# Altium PCB Odin_0.pcbdoc (part 1 of 3)
Units mil, origin at the board's own origin, x right, y up, seen from the top; angles counter-clockwise.
Board outline 3937 x 3937 mil, 4 copper layers (Top Layer, mSIG, mPWR, Bottom Layer), stack 62.3 mil thick; 149 components, 218 nets, 830 pads, 480 vias.
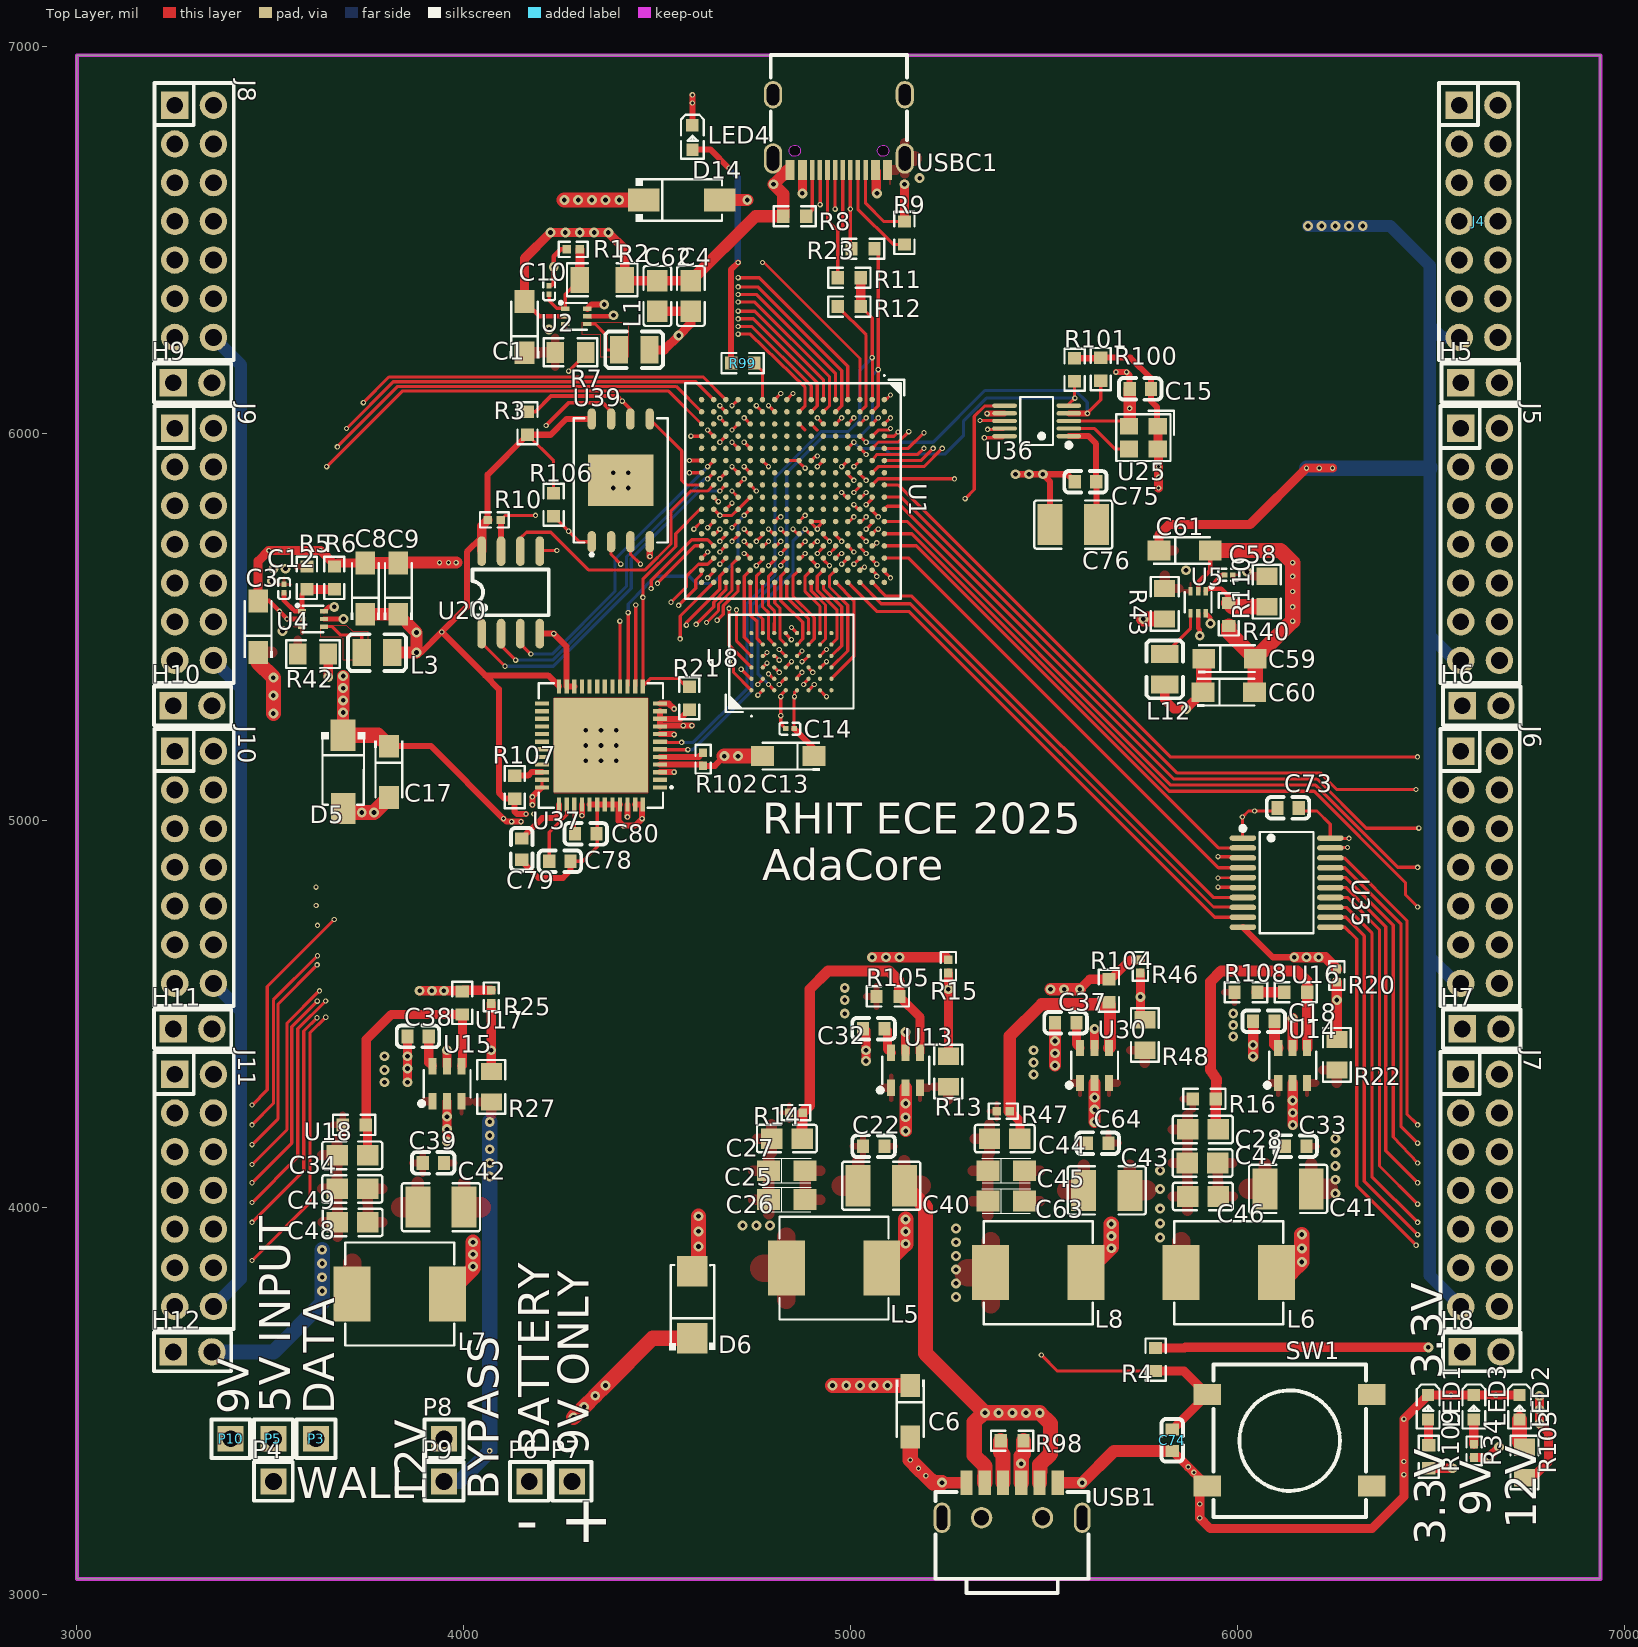
[diagram p0: Top Layer view]
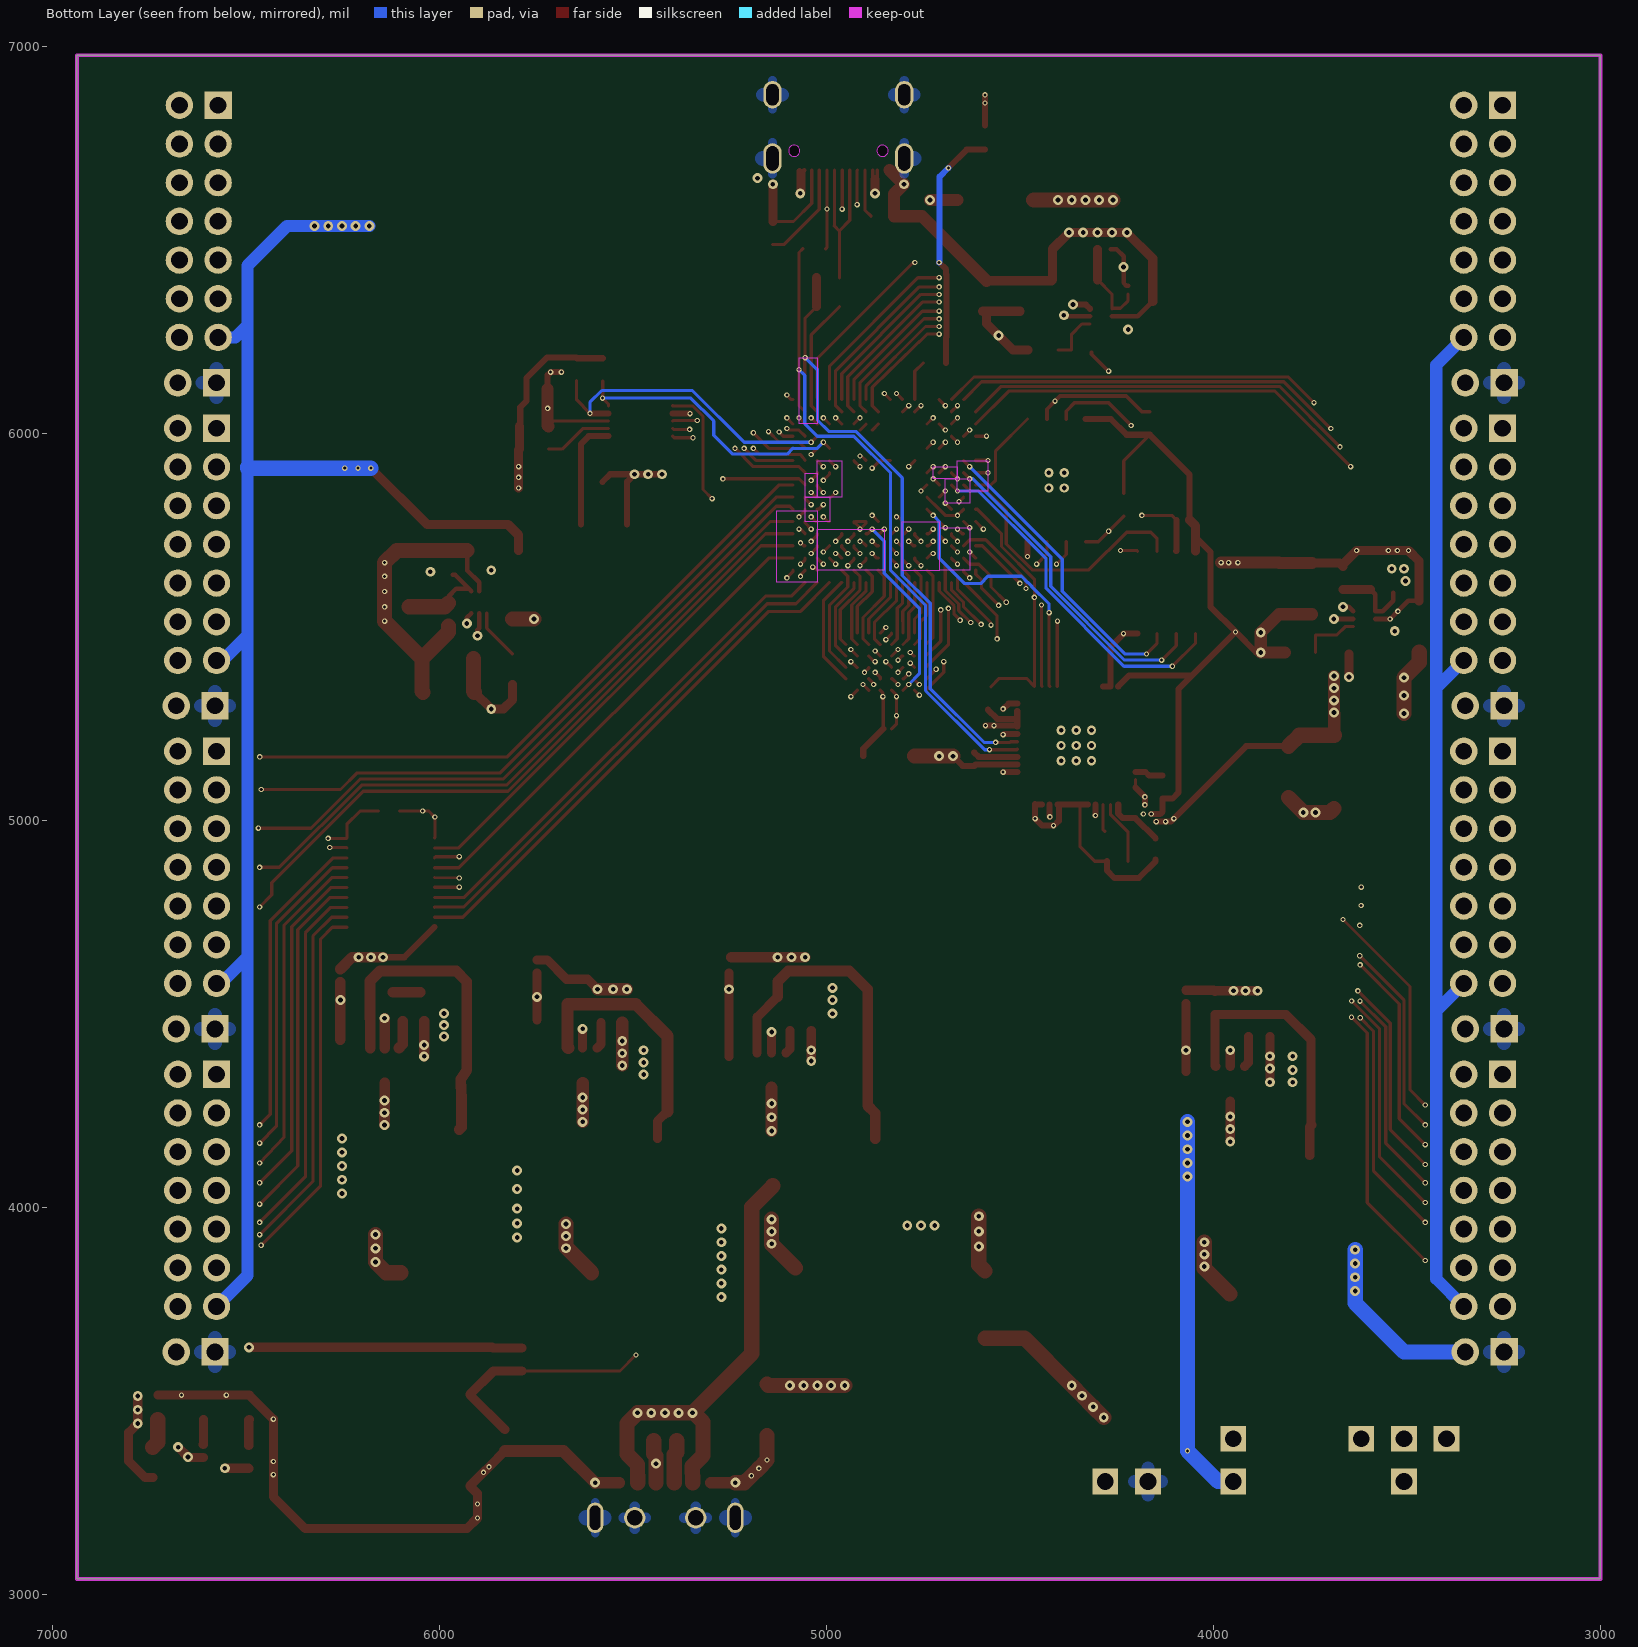
[diagram p1: Bottom Layer view, seen from below]
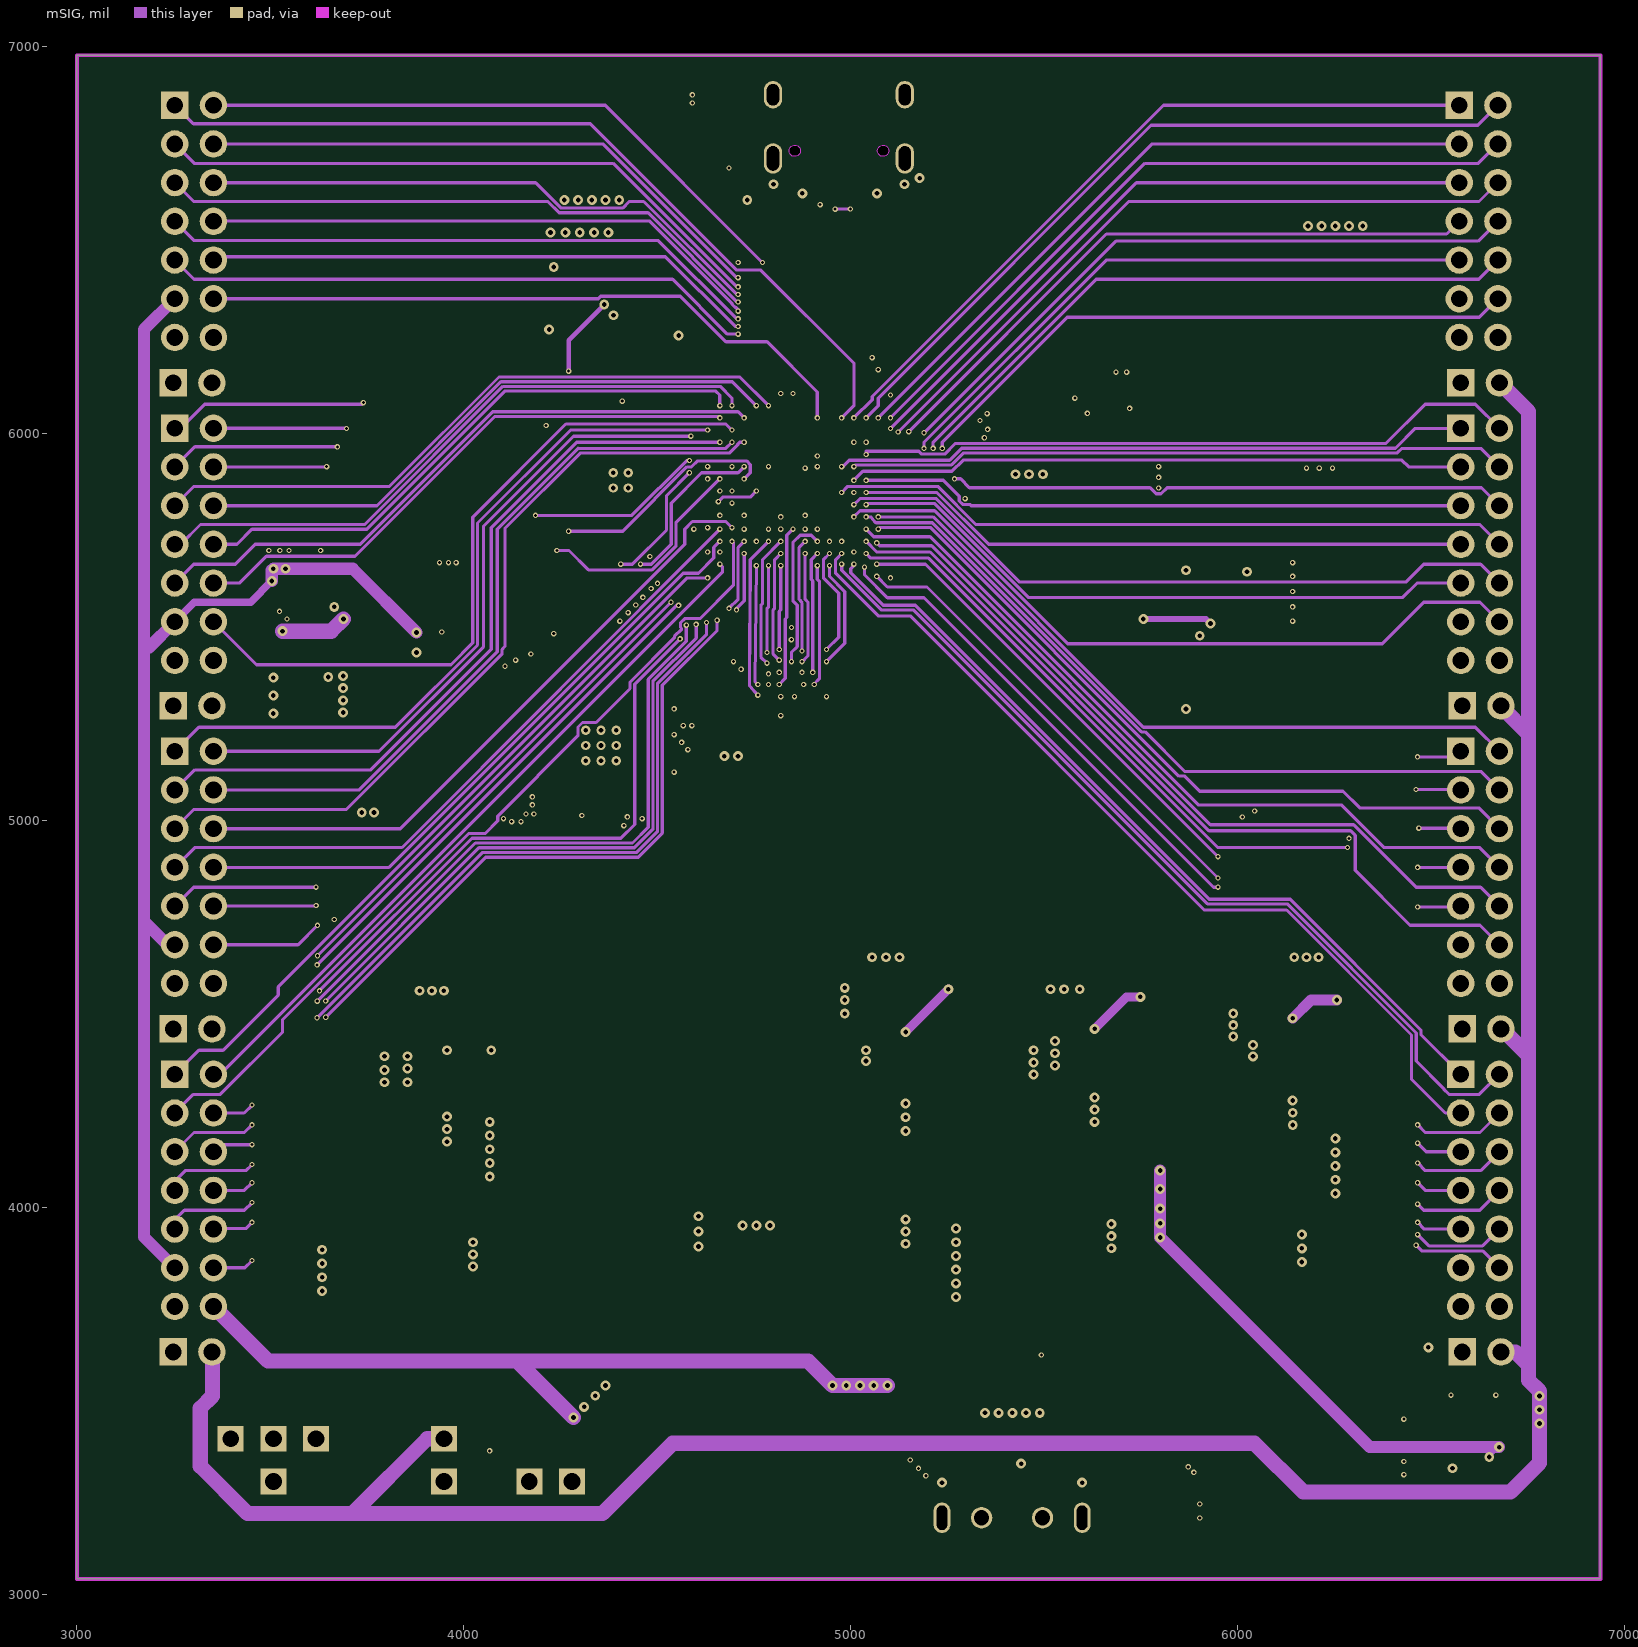
[diagram p2: mSIG]
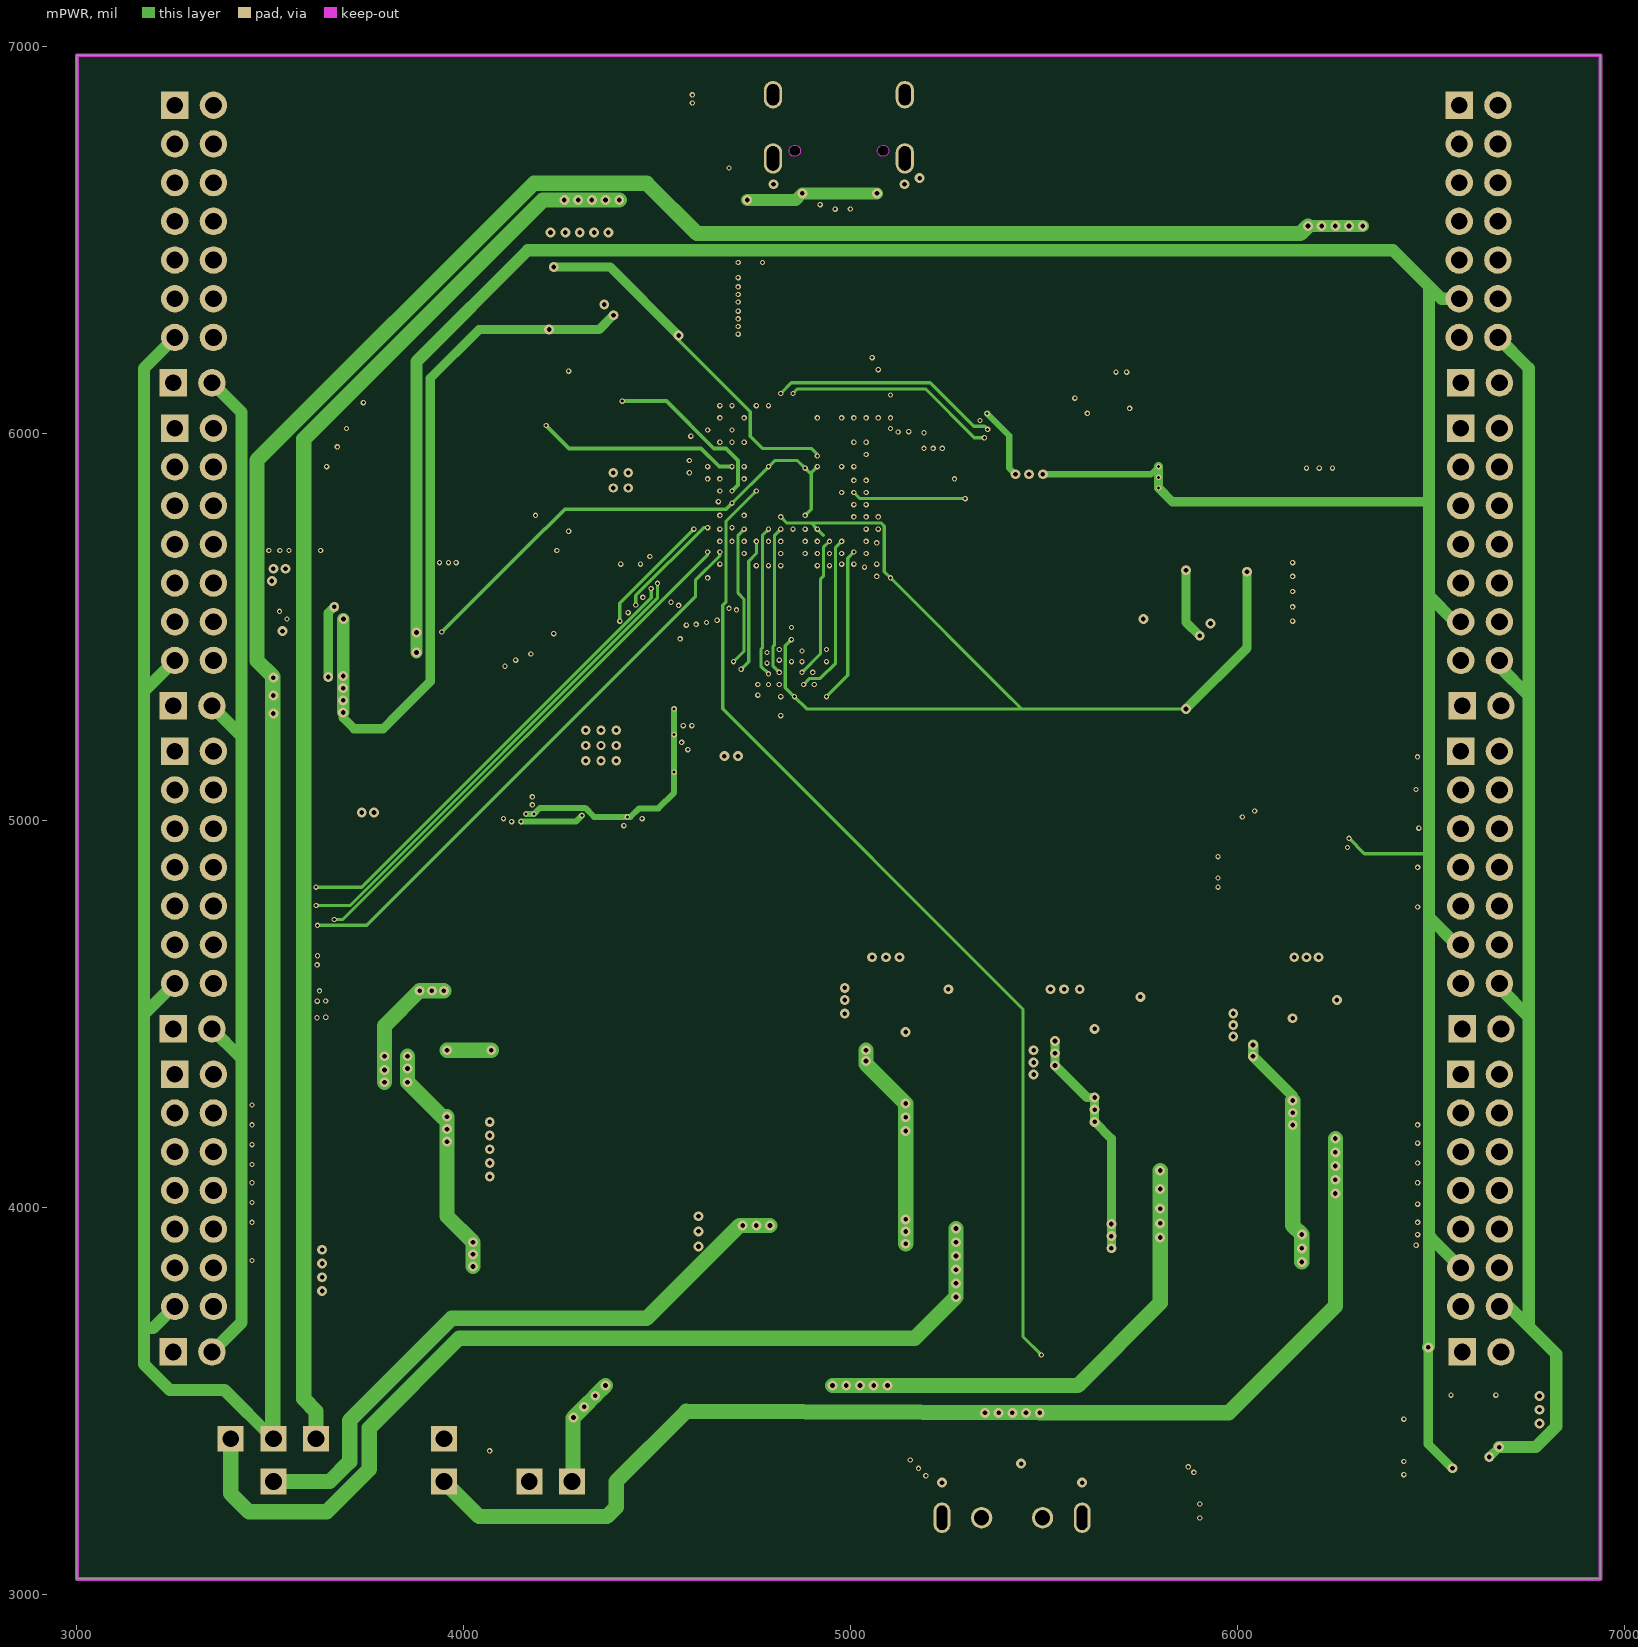
[diagram p3: mPWR]

## Layer stack, top to bottom
Top Solder Mask Layer: solder mask 0.4, Dk 3.3
Top Layer: signal copper 1.4
Dielectric1: surface 18.9, PP, Dk 4.5
mSIG: signal copper 1.4
Dielectric2: surface 18.9, FR4, Dk 4.5
mPWR: signal copper 1.4
Dielectric3: surface 18.9, PP, Dk 4.5
Bottom Layer: signal copper 1.4
Bottom Solder Mask Layer: solder mask 0.4, Dk 3.3

## Board outline
3000,3040.8 3000,6977.8 6937,6977.8 6937,3040.8

## Design rules (kind name [scope] priority, off if disabled: settings)
BoardOutlineClearance Default [All] p0: genericclearance=10 ignorepadtopadclearanceinfootprint=FALSE except(0: Arc-SplitContinuation Track-SplitContinuation SMDPad-SplitContinuation THPad-SplitContinuation Via-SplitContinuation Fill-SplitContinuation Poly-SplitContinuation Region-SplitContinuation Text-SplitContinuation)
BoardOutlineClearance Plane_Default [All] p0: genericclearance=10 ignorepadtopadclearanceinfootprint=FALSE except(0: Arc-SplitContinuation Track-SplitContinuation SMDPad-SplitContinuation THPad-SplitContinuation Via-SplitContinuation Fill-SplitContinuation Poly-SplitContinuation Region-SplitContinuation Text-SplitContinuation)
BoardOutlineClearance Copper_Default [All] p0: genericclearance=10 ignorepadtopadclearanceinfootprint=FALSE except(0: Arc-SplitContinuation Track-SplitContinuation SMDPad-SplitContinuation THPad-SplitContinuation Via-SplitContinuation Fill-SplitContinuation Poly-SplitContinuation Region-SplitContinuation Text-SplitContinuation)
BoardOutlineClearance Copper_gge174503 [All] p0: genericclearance=10 ignorepadtopadclearanceinfootprint=FALSE except(0: Arc-SplitContinuation Track-SplitContinuation SMDPad-SplitContinuation THPad-SplitContinuation Via-SplitContinuation Fill-SplitContinuation Poly-SplitContinuation Region-SplitContinuation Text-SplitContinuation)
BoardOutlineClearance Copper_gge40692 [All] p0: genericclearance=10 ignorepadtopadclearanceinfootprint=FALSE except(0: Arc-SplitContinuation Track-SplitContinuation SMDPad-SplitContinuation THPad-SplitContinuation Via-SplitContinuation Fill-SplitContinuation Poly-SplitContinuation Region-SplitContinuation Text-SplitContinuation)
BoardOutlineClearance Copper_gge45518 [All] p0: genericclearance=10 ignorepadtopadclearanceinfootprint=FALSE except(0: Arc-SplitContinuation Track-SplitContinuation SMDPad-SplitContinuation THPad-SplitContinuation Via-SplitContinuation Fill-SplitContinuation Poly-SplitContinuation Region-SplitContinuation Text-SplitContinuation)
BoardOutlineClearance Copper_gge47558 [All] p0: genericclearance=10 ignorepadtopadclearanceinfootprint=FALSE except(0: Arc-SplitContinuation Track-SplitContinuation SMDPad-SplitContinuation THPad-SplitContinuation Via-SplitContinuation Fill-SplitContinuation Poly-SplitContinuation Region-SplitContinuation Text-SplitContinuation)
BoardOutlineClearance Copper_gge48503 [All] p0: genericclearance=10 ignorepadtopadclearanceinfootprint=FALSE except(0: Arc-SplitContinuation Track-SplitContinuation SMDPad-SplitContinuation THPad-SplitContinuation Via-SplitContinuation Fill-SplitContinuation Poly-SplitContinuation Region-SplitContinuation Text-SplitContinuation)
BoardOutlineClearance Copper_gge48509 [All] p0: genericclearance=10 ignorepadtopadclearanceinfootprint=FALSE except(0: Arc-SplitContinuation Track-SplitContinuation SMDPad-SplitContinuation THPad-SplitContinuation Via-SplitContinuation Fill-SplitContinuation Poly-SplitContinuation Region-SplitContinuation Text-SplitContinuation)
BoardOutlineClearance Copper_gge55369 [All] p0: genericclearance=10 ignorepadtopadclearanceinfootprint=FALSE except(0: Arc-SplitContinuation Track-SplitContinuation SMDPad-SplitContinuation THPad-SplitContinuation Via-SplitContinuation Fill-SplitContinuation Poly-SplitContinuation Region-SplitContinuation Text-SplitContinuation)
BoardOutlineClearance Copper_gge55381 [All] p0: genericclearance=10 ignorepadtopadclearanceinfootprint=FALSE except(0: Arc-SplitContinuation Track-SplitContinuation SMDPad-SplitContinuation THPad-SplitContinuation Via-SplitContinuation Fill-SplitContinuation Poly-SplitContinuation Region-SplitContinuation Text-SplitContinuation)
BoardOutlineClearance Copper_gge70515 [All] p0: genericclearance=10 ignorepadtopadclearanceinfootprint=FALSE except(0: Arc-SplitContinuation Track-SplitContinuation SMDPad-SplitContinuation THPad-SplitContinuation Via-SplitContinuation Fill-SplitContinuation Poly-SplitContinuation Region-SplitContinuation Text-SplitContinuation)
BoardOutlineClearance Copper_gge71742 [All] p0: genericclearance=10 ignorepadtopadclearanceinfootprint=FALSE except(0: Arc-SplitContinuation Track-SplitContinuation SMDPad-SplitContinuation THPad-SplitContinuation Via-SplitContinuation Fill-SplitContinuation Poly-SplitContinuation Region-SplitContinuation Text-SplitContinuation)
BoardOutlineClearance Copper_gge72967 [All] p0: genericclearance=10 ignorepadtopadclearanceinfootprint=FALSE except(0: Arc-SplitContinuation Track-SplitContinuation SMDPad-SplitContinuation THPad-SplitContinuation Via-SplitContinuation Fill-SplitContinuation Poly-SplitContinuation Region-SplitContinuation Text-SplitContinuation)
BoardOutlineClearance Copper_gge73033 [All] p0: genericclearance=10 ignorepadtopadclearanceinfootprint=FALSE except(0: Arc-SplitContinuation Track-SplitContinuation SMDPad-SplitContinuation THPad-SplitContinuation Via-SplitContinuation Fill-SplitContinuation Poly-SplitContinuation Region-SplitContinuation Text-SplitContinuation)
BoardOutlineClearance Copper_gge75860 [All] p0: genericclearance=10 ignorepadtopadclearanceinfootprint=FALSE except(0: Arc-SplitContinuation Track-SplitContinuation SMDPad-SplitContinuation THPad-SplitContinuation Via-SplitContinuation Fill-SplitContinuation Poly-SplitContinuation Region-SplitContinuation Text-SplitContinuation)
BoardOutlineClearance Copper_gge75899 [All] p0: genericclearance=10 ignorepadtopadclearanceinfootprint=FALSE except(0: Arc-SplitContinuation Track-SplitContinuation SMDPad-SplitContinuation THPad-SplitContinuation Via-SplitContinuation Fill-SplitContinuation Poly-SplitContinuation Region-SplitContinuation Text-SplitContinuation)
BoardOutlineClearance Copper_gge90659 [All] p0: genericclearance=10 ignorepadtopadclearanceinfootprint=FALSE except(0: Arc-SplitContinuation Track-SplitContinuation SMDPad-SplitContinuation THPad-SplitContinuation Via-SplitContinuation Fill-SplitContinuation Poly-SplitContinuation Region-SplitContinuation Text-SplitContinuation)
BoardOutlineClearance Copper_gge93999 [All] p0: genericclearance=10 ignorepadtopadclearanceinfootprint=FALSE except(0: Arc-SplitContinuation Track-SplitContinuation SMDPad-SplitContinuation THPad-SplitContinuation Via-SplitContinuation Fill-SplitContinuation Poly-SplitContinuation Region-SplitContinuation Text-SplitContinuation)
BoardOutlineClearance Copper_gge94008 [All] p0: genericclearance=10 ignorepadtopadclearanceinfootprint=FALSE except(0: Arc-SplitContinuation Track-SplitContinuation SMDPad-SplitContinuation THPad-SplitContinuation Via-SplitContinuation Fill-SplitContinuation Poly-SplitContinuation Region-SplitContinuation Text-SplitContinuation)
BoardOutlineClearance Copper_gge94017 [All] p0: genericclearance=10 ignorepadtopadclearanceinfootprint=FALSE except(0: Arc-SplitContinuation Track-SplitContinuation SMDPad-SplitContinuation THPad-SplitContinuation Via-SplitContinuation Fill-SplitContinuation Poly-SplitContinuation Region-SplitContinuation Text-SplitContinuation)
BoardOutlineClearance Copper_gge94170 [All] p0: genericclearance=10 ignorepadtopadclearanceinfootprint=FALSE except(0: Arc-SplitContinuation Track-SplitContinuation SMDPad-SplitContinuation THPad-SplitContinuation Via-SplitContinuation Fill-SplitContinuation Poly-SplitContinuation Region-SplitContinuation Text-SplitContinuation)
BoardOutlineClearance Copper_gge94926 [All] p0: genericclearance=10 ignorepadtopadclearanceinfootprint=FALSE except(0: Arc-SplitContinuation Track-SplitContinuation SMDPad-SplitContinuation THPad-SplitContinuation Via-SplitContinuation Fill-SplitContinuation Poly-SplitContinuation Region-SplitContinuation Text-SplitContinuation)
BoardOutlineClearance Copper_gge95013 [All] p0: genericclearance=10 ignorepadtopadclearanceinfootprint=FALSE except(0: Arc-SplitContinuation Track-SplitContinuation SMDPad-SplitContinuation THPad-SplitContinuation Via-SplitContinuation Fill-SplitContinuation Poly-SplitContinuation Region-SplitContinuation Text-SplitContinuation)
BoardOutlineClearance Copper_gge95052 [All] p0: genericclearance=10 ignorepadtopadclearanceinfootprint=FALSE except(0: Arc-SplitContinuation Track-SplitContinuation SMDPad-SplitContinuation THPad-SplitContinuation Via-SplitContinuation Fill-SplitContinuation Poly-SplitContinuation Region-SplitContinuation Text-SplitContinuation)
BoardOutlineClearance Copper_gge95158 [All] p0: genericclearance=10 ignorepadtopadclearanceinfootprint=FALSE except(0: Arc-SplitContinuation Track-SplitContinuation SMDPad-SplitContinuation THPad-SplitContinuation Via-SplitContinuation Fill-SplitContinuation Poly-SplitContinuation Region-SplitContinuation Text-SplitContinuation)
BoardOutlineClearance Copper_gge95752 [All] p0: genericclearance=10 ignorepadtopadclearanceinfootprint=FALSE except(0: Arc-SplitContinuation Track-SplitContinuation SMDPad-SplitContinuation THPad-SplitContinuation Via-SplitContinuation Fill-SplitContinuation Poly-SplitContinuation Region-SplitContinuation Text-SplitContinuation)
BoardOutlineClearance Copper_gge95761 [All] p0: genericclearance=10 ignorepadtopadclearanceinfootprint=FALSE except(0: Arc-SplitContinuation Track-SplitContinuation SMDPad-SplitContinuation THPad-SplitContinuation Via-SplitContinuation Fill-SplitContinuation Poly-SplitContinuation Region-SplitContinuation Text-SplitContinuation)
BoardOutlineClearance Copper_gge95851 [All] p0: genericclearance=10 ignorepadtopadclearanceinfootprint=FALSE except(0: Arc-SplitContinuation Track-SplitContinuation SMDPad-SplitContinuation THPad-SplitContinuation Via-SplitContinuation Fill-SplitContinuation Poly-SplitContinuation Region-SplitContinuation Text-SplitContinuation)
BoardOutlineClearance Copper_gge95998 [All] p0: genericclearance=10 ignorepadtopadclearanceinfootprint=FALSE except(0: Arc-SplitContinuation Track-SplitContinuation SMDPad-SplitContinuation THPad-SplitContinuation Via-SplitContinuation Fill-SplitContinuation Poly-SplitContinuation Region-SplitContinuation Text-SplitContinuation)
BoardOutlineClearance Copper_gge96131 [All] p0: genericclearance=10 ignorepadtopadclearanceinfootprint=FALSE except(0: Arc-SplitContinuation Track-SplitContinuation SMDPad-SplitContinuation THPad-SplitContinuation Via-SplitContinuation Fill-SplitContinuation Poly-SplitContinuation Region-SplitContinuation Text-SplitContinuation)
BoardOutlineClearance Copper_gge100679 [All] p0: genericclearance=10 ignorepadtopadclearanceinfootprint=FALSE except(0: Arc-SplitContinuation Track-SplitContinuation SMDPad-SplitContinuation THPad-SplitContinuation Via-SplitContinuation Fill-SplitContinuation Poly-SplitContinuation Region-SplitContinuation Text-SplitContinuation)
BoardOutlineClearance Copper_gge45518(1) [All] p0: genericclearance=10 ignorepadtopadclearanceinfootprint=FALSE except(0: Arc-SplitContinuation Track-SplitContinuation SMDPad-SplitContinuation THPad-SplitContinuation Via-SplitContinuation Fill-SplitContinuation Poly-SplitContinuation Region-SplitContinuation Text-SplitContinuation)
BoardOutlineClearance Copper_gge104233 [All] p0: genericclearance=10 ignorepadtopadclearanceinfootprint=FALSE except(0: Arc-SplitContinuation Track-SplitContinuation SMDPad-SplitContinuation THPad-SplitContinuation Via-SplitContinuation Fill-SplitContinuation Poly-SplitContinuation Region-SplitContinuation Text-SplitContinuation)
BoardOutlineClearance Copper_gge107033 [All] p0: genericclearance=10 ignorepadtopadclearanceinfootprint=FALSE except(0: Arc-SplitContinuation Track-SplitContinuation SMDPad-SplitContinuation THPad-SplitContinuation Via-SplitContinuation Fill-SplitContinuation Poly-SplitContinuation Region-SplitContinuation Text-SplitContinuation)
BoardOutlineClearance Copper_gge109351 [All] p0: genericclearance=10 ignorepadtopadclearanceinfootprint=FALSE except(0: Arc-SplitContinuation Track-SplitContinuation SMDPad-SplitContinuation THPad-SplitContinuation Via-SplitContinuation Fill-SplitContinuation Poly-SplitContinuation Region-SplitContinuation Text-SplitContinuation)
BoardOutlineClearance otherClearance [All] p0: genericclearance=10 ignorepadtopadclearanceinfootprint=FALSE except(0: Arc-SplitContinuation Track-SplitContinuation SMDPad-SplitContinuation THPad-SplitContinuation Via-SplitContinuation Fill-SplitContinuation Poly-SplitContinuation Region-SplitContinuation Text-SplitContinuation)
Clearance Default [All] p1: gap=7 ignorepadtopadclearanceinfootprint=FALSE
Clearance Plane_Default [All] p1: gap=7 ignorepadtopadclearanceinfootprint=FALSE
Clearance Copper_Default [All] p1: gap=7 ignorepadtopadclearanceinfootprint=FALSE
Clearance Copper_gge174503 [All] p1: gap=7 ignorepadtopadclearanceinfootprint=FALSE
Clearance Copper_gge40692 [All] p1: gap=7 ignorepadtopadclearanceinfootprint=FALSE
Clearance Copper_gge45518 [All] p1: gap=7 ignorepadtopadclearanceinfootprint=FALSE
Clearance Copper_gge47558 [All] p1: gap=7 ignorepadtopadclearanceinfootprint=FALSE
Clearance Copper_gge48503 [All] p1: gap=7 ignorepadtopadclearanceinfootprint=FALSE
Clearance Copper_gge48509 [All] p1: gap=7 ignorepadtopadclearanceinfootprint=FALSE
Clearance Copper_gge55369 [All] p1: gap=7 ignorepadtopadclearanceinfootprint=FALSE
Clearance Copper_gge55381 [All] p1: gap=7 ignorepadtopadclearanceinfootprint=FALSE
Clearance Copper_gge70515 [All] p1: gap=7 ignorepadtopadclearanceinfootprint=FALSE
Clearance Copper_gge71742 [All] p1: gap=7 ignorepadtopadclearanceinfootprint=FALSE
Clearance Copper_gge72967 [All] p1: gap=7 ignorepadtopadclearanceinfootprint=FALSE
Clearance Copper_gge73033 [All] p1: gap=7 ignorepadtopadclearanceinfootprint=FALSE
Clearance Copper_gge75860 [All] p1: gap=7 ignorepadtopadclearanceinfootprint=FALSE
Clearance Copper_gge75899 [All] p1: gap=7 ignorepadtopadclearanceinfootprint=FALSE
Clearance Copper_gge90659 [All] p1: gap=7 ignorepadtopadclearanceinfootprint=FALSE
Clearance Copper_gge93999 [All] p1: gap=7 ignorepadtopadclearanceinfootprint=FALSE
Clearance Copper_gge94008 [All] p1: gap=7 ignorepadtopadclearanceinfootprint=FALSE
Clearance Copper_gge94017 [All] p1: gap=7 ignorepadtopadclearanceinfootprint=FALSE
Clearance Copper_gge94170 [All] p1: gap=7 ignorepadtopadclearanceinfootprint=FALSE
Clearance Copper_gge94926 [All] p1: gap=7 ignorepadtopadclearanceinfootprint=FALSE
Clearance Copper_gge95013 [All] p1: gap=7 ignorepadtopadclearanceinfootprint=FALSE
Clearance Copper_gge95052 [All] p1: gap=7 ignorepadtopadclearanceinfootprint=FALSE
Clearance Copper_gge95158 [All] p1: gap=7 ignorepadtopadclearanceinfootprint=FALSE
Clearance Copper_gge95752 [All] p1: gap=7 ignorepadtopadclearanceinfootprint=FALSE
Clearance Copper_gge95761 [All] p1: gap=7 ignorepadtopadclearanceinfootprint=FALSE
Clearance Copper_gge95851 [All] p1: gap=7 ignorepadtopadclearanceinfootprint=FALSE
Clearance Copper_gge95998 [All] p1: gap=7 ignorepadtopadclearanceinfootprint=FALSE
Clearance Copper_gge96131 [All] p1: gap=7 ignorepadtopadclearanceinfootprint=FALSE
Clearance Copper_gge100679 [All] p1: gap=7 ignorepadtopadclearanceinfootprint=FALSE
Clearance Copper_gge45518(1) [All] p1: gap=7 ignorepadtopadclearanceinfootprint=FALSE
Clearance Copper_gge104233 [All] p1: gap=7 ignorepadtopadclearanceinfootprint=FALSE
Clearance Copper_gge107033 [All] p1: gap=7 ignorepadtopadclearanceinfootprint=FALSE
Clearance Copper_gge109351 [All] p1: gap=7 ignorepadtopadclearanceinfootprint=FALSE
Clearance otherClearance [All] p1: gap=7 ignorepadtopadclearanceinfootprint=FALSE
DiffPairsRouting differentialPair [All] p1: maxuncoupledlength=10 minlimit=5.9843 maxlimit=Infinity mostfreqgap=5.9843 toplayer_minwidth=5 toplayer_prefwidth=10 toplayer_maxwidth=100 bottomlayer_minwidth=5 bottomlayer_prefwidth=10 bottomlayer_maxwidth=100 midlayer1_minwidth=5 midlayer1_prefwidth=10 midlayer1_maxwidth=100 midlayer2_minwidth=5 midlayer2_prefwidth=10 midlayer2_maxwidth=100
PasteMaskExpansion Common [All] p1: expansion=0
PlaneConnect Default [All] p1: planeconnectstyle=Relief reliefexpansion=20 reliefentries=4 reliefconductorwidth=0 reliefairgap=10
PolygonConnect Default [All] p1: connectstyle=Relief reliefentries=4 reliefconductorwidth=0 polygonreliefangle="90 Angle" airgapwidth=0.9843
PolygonConnect gge174503 [All] p1: connectstyle=Relief reliefentries=4 reliefconductorwidth=0 polygonreliefangle="90 Angle" airgapwidth=0.9843
PolygonConnect gge40692 [All] p1: connectstyle=Relief reliefentries=4 reliefconductorwidth=0 polygonreliefangle="90 Angle" airgapwidth=0.9843
PolygonConnect gge45518 [All] p1: connectstyle=Relief reliefentries=4 reliefconductorwidth=0 polygonreliefangle="90 Angle" airgapwidth=0.9843
PolygonConnect gge47558 [All] p1: connectstyle=Relief reliefentries=4 reliefconductorwidth=0 polygonreliefangle="90 Angle" airgapwidth=0.9843
PolygonConnect gge48503 [All] p1: connectstyle=Relief reliefentries=4 reliefconductorwidth=0 polygonreliefangle="90 Angle" airgapwidth=0.9843
PolygonConnect gge48509 [All] p1: connectstyle=Relief reliefentries=4 reliefconductorwidth=0 polygonreliefangle="90 Angle" airgapwidth=0.9843
PolygonConnect gge55369 [All] p1: connectstyle=Relief reliefentries=4 reliefconductorwidth=0 polygonreliefangle="90 Angle" airgapwidth=0.9843
PolygonConnect gge55381 [All] p1: connectstyle=Relief reliefentries=4 reliefconductorwidth=0 polygonreliefangle="90 Angle" airgapwidth=0.9843
PolygonConnect gge70515 [All] p1: connectstyle=Relief reliefentries=4 reliefconductorwidth=0 polygonreliefangle="90 Angle" airgapwidth=0.9843
PolygonConnect gge71742 [All] p1: connectstyle=Relief reliefentries=4 reliefconductorwidth=0 polygonreliefangle="90 Angle" airgapwidth=0.9843
PolygonConnect gge72967 [All] p1: connectstyle=Relief reliefentries=4 reliefconductorwidth=0 polygonreliefangle="90 Angle" airgapwidth=0.9843
PolygonConnect gge73033 [All] p1: connectstyle=Relief reliefentries=4 reliefconductorwidth=0 polygonreliefangle="90 Angle" airgapwidth=0.9843
PolygonConnect gge75860 [All] p1: connectstyle=Relief reliefentries=4 reliefconductorwidth=0 polygonreliefangle="90 Angle" airgapwidth=0.9843
PolygonConnect gge75899 [All] p1: connectstyle=Relief reliefentries=4 reliefconductorwidth=0 polygonreliefangle="90 Angle" airgapwidth=0.9843
PolygonConnect gge90659 [All] p1: connectstyle=Relief reliefentries=4 reliefconductorwidth=0 polygonreliefangle="90 Angle" airgapwidth=0.9843
PolygonConnect gge93999 [All] p1: connectstyle=Relief reliefentries=4 reliefconductorwidth=0 polygonreliefangle="90 Angle" airgapwidth=0.9843
PolygonConnect gge94008 [All] p1: connectstyle=Relief reliefentries=4 reliefconductorwidth=0 polygonreliefangle="90 Angle" airgapwidth=0.9843
PolygonConnect gge94017 [All] p1: connectstyle=Relief reliefentries=4 reliefconductorwidth=0 polygonreliefangle="90 Angle" airgapwidth=0.9843
PolygonConnect gge94170 [All] p1: connectstyle=Relief reliefentries=4 reliefconductorwidth=0 polygonreliefangle="90 Angle" airgapwidth=0.9843
PolygonConnect gge94926 [All] p1: connectstyle=Relief reliefentries=4 reliefconductorwidth=0 polygonreliefangle="90 Angle" airgapwidth=0.9843
PolygonConnect gge95013 [All] p1: connectstyle=Relief reliefentries=4 reliefconductorwidth=0 polygonreliefangle="90 Angle" airgapwidth=0.9843
PolygonConnect gge95052 [All] p1: connectstyle=Relief reliefentries=4 reliefconductorwidth=0 polygonreliefangle="90 Angle" airgapwidth=0.9843
PolygonConnect gge95158 [All] p1: connectstyle=Relief reliefentries=4 reliefconductorwidth=0 polygonreliefangle="90 Angle" airgapwidth=0.9843
PolygonConnect gge95752 [All] p1: connectstyle=Relief reliefentries=4 reliefconductorwidth=0 polygonreliefangle="90 Angle" airgapwidth=0.9843
PolygonConnect gge95761 [All] p1: connectstyle=Relief reliefentries=4 reliefconductorwidth=0 polygonreliefangle="90 Angle" airgapwidth=0.9843
PolygonConnect gge95851 [All] p1: connectstyle=Relief reliefentries=4 reliefconductorwidth=0 polygonreliefangle="90 Angle" airgapwidth=0.9843
PolygonConnect gge95998 [All] p1: connectstyle=Relief reliefentries=4 reliefconductorwidth=0 polygonreliefangle="90 Angle" airgapwidth=0.9843
PolygonConnect gge96131 [All] p1: connectstyle=Relief reliefentries=4 reliefconductorwidth=0 polygonreliefangle="90 Angle" airgapwidth=0.9843
PolygonConnect gge100679 [All] p1: connectstyle=Relief reliefentries=4 reliefconductorwidth=0 polygonreliefangle="90 Angle" airgapwidth=0.9843
PolygonConnect gge45518(1) [All] p1: connectstyle=Relief reliefentries=4 reliefconductorwidth=0 polygonreliefangle="90 Angle" airgapwidth=0.9843
PolygonConnect gge104233 [All] p1: connectstyle=Relief reliefentries=4 reliefconductorwidth=0 polygonreliefangle="90 Angle" airgapwidth=0.9843
PolygonConnect gge107033 [All] p1: connectstyle=Relief reliefentries=4 reliefconductorwidth=0 polygonreliefangle="90 Angle" airgapwidth=0.9843
PolygonConnect gge109351 [All] p1: connectstyle=Relief reliefentries=4 reliefconductorwidth=0 polygonreliefangle="90 Angle" airgapwidth=0.9843
RoutingVias Default [All] p1: viastyle="Through Hole" holewidth=7.9134 minholewidth=7.9134 maxholewidth=2362.0078 width=7.9134 minwidth=7.9134 maxwidth=2362.0078
SolderMaskExpansion Common [IsVia] p1: useseparateexpansions=TRUE expansion=-1000 expansionbottom=-1000
SolderMaskExpansion Common [All] p2: useseparateexpansions=TRUE expansion=2.0079 expansionbottom=2.0079
Width Default [All] p1: maxlimit=1000 minlimit=8 preferedwidth=8
Width trackWidth1 [All] p1: maxlimit=79 minlimit=8 preferedwidth=8

## Components (designator, comment, footprint, x,y, rotation, side; value= is the part's Value field where it differs from the comment)
C1 "10uF" CAP-SMD_L3.2-W1.6-RD#1 4156.8,6275.6 r90 top
C3 "10uF" CAP-SMD_L3.2-W1.6-RD#2 3468.5,5501.4 r90 top
C4 "22uF" C0805#1 4586.6,6355.7 r270 top
C6 "10uF" CAP-SMD_L3.2-W1.6-RD#1 5153.5,3473.8 r270 top
C8 "10uF" CAP-SMD_L3.2-W1.6-RD#3 3745.4,5599.6 r90 top
C9 "10uF" CAP-SMD_L3.2-W1.6-RD#2 3830.7,5599.8 r90 top
C10 "10pF" C0201 4220.5,6371.5 r90 top
C12 "10pF" C0201 3535.4,5599.8 r90 top
C13 "10uF" CAP-SMD_L3.2-W1.6-RD#2 4838.6,5166.8 r180 top
C14 "10pF" C0201 4842.5,5237.6 r0 top
C15 "10nF" C0603#1 5748,6115.6 r0 top
C17 "10uF" CAP-SMD_L3.2-W1.6-RD#2 3806.4,5126 r270 top
C18 "100nF" C0603#1 6066.9,4481.7 r0 top
C22 "100nF" C0603#2 5059.1,4158.8 r0 top
C25 "22uF" CASE-A_3216 4834.7,4095.8 r0 top
C26 "22uF" CASE-A_3216 4834.7,4021 r0 top
C27 "75pF" C0805#1 4834.7,4178.5 r0 top
C28 "75pF" C0805#1 5909.5,4202.1 r0 top
C32 "100nF" C0603#2 5059.1,4462 r0 top
C33 "100nF" C0603#1 6149.6,4158.8 r0 top
C34 "75pF" C0805#2 3711.8,4135.3 r0 top
C37 "100nF" C0603#1 5555.1,4477.7 r0 top
C38 "100nF" C0603#3 3881.9,4442.3 r0 top
C39 "100nF" C0603#2 3921.3,4115.6 r0 top
C40 "10uF" C1210#1 5078.8,4056.5 r0 top
C41 "10uF" C1210#2 6129.9,4048.6 r0 top
C42 "10uF" C1210#2 3940.9,4001.4 r0 top
C43 "10uF" C1210#2 5661.4,4044.7 r0 top
C44 "75pF" C0805#3 5397.6,4178.5 r0 top
C45 "22uF" CASE-A_3216 5401.6,4095.8 r0 top
C46 "22uF" C0805#3 5909.5,4028.9 r180 top
C47 "22uF" C0805#3 5908.7,4115.5 r180 top
C48 "22uF" C0805#2 3712.6,3962 r180 top
C49 "22uF" C0805#2 3711.8,4048.6 r180 top
C58 "10pF" C0201 5976.4,5635.3 r0 top
C59 "10uF" CAP-SMD_L3.2-W1.6-RD#2 5978.4,5418.7 r0 top
C60 "10uF" CAP-SMD_L3.2-W1.6-RD#2 5976.4,5332.1 r0 top
C61 "10uF" CAP-SMD_L3.2-W1.6-RD#2 5862.2,5698.2 r0 top
C62 "22uF" C0805#1 4500,6355.7 r270 top
C63 "22uF" CASE-A_3216 5401.6,4017.1 r0 top
C64 "100nF" C0603#1 5637.8,4166.7 r0 top
C73 "100nF" C0603#1 6129.9,5032.9 r0 top
C74 "100nF" C0603#1 5830.7,3399 r90 top
C75 "100nF" C0603#3 5606.3,5875.4 r180 top
C76 "10uF" C1210#3 5574.8,5765.2 r180 top
C78 "100nF" C0603#2 4248,4895.1 r180 top
C79 "100nF" C0603#3 4149.6,4926.6 r90 top
C80 "100nF" C0603#1 4315,4966 r180 top
D5 "1SMA5918A_C19077487" SMA_L4.3-W2.6-LS5.0-RD 3688.3,5126 r270 top
D6 "1SMA5924BT3G" SMA_L4.3-W2.6-LS5.2-RD 4590.5,3749.4 r90 top
D14 "SS54_C22452" SMA_L4.4-W2.8-LS5.4-R-RD 4563,6603.8 r0 top
H5 "3-644456-2" HDR-TH_2P-P2.54-V-M-1 6626,6131.3 r0 top
H6 "3-644456-2" HDR-TH_2P-P2.54-V-M-1 6629.9,5296.7 r0 top
H7 "3-644456-2" HDR-TH_2P-P2.54-V-M-1 6629.9,4462 r0 top
H8 "3-644456-2" HDR-TH_2P-P2.54-V-M-1 6629.9,3627.4 r0 top
H9 "3-644456-2" HDR-TH_2P-P2.54-V-M-1 3299.2,6131.3 r0 top
H10 "3-644456-2" HDR-TH_2P-P2.54-V-M-1 3299.2,5296.7 r0 top
H11 "3-644456-2" HDR-TH_2P-P2.54-V-M-1 3299.2,4462 r0 top
H12 "3-644456-2" HDR-TH_2P-P2.54-V-M-1 3299.2,3627.4 r0 top
J4 "2.54-2*7P母" HDR-TH_14P-P2.54-V-F-R2-C7-S2.54-1 6622,6548.6 r270 top
J5 "2.54-2*7P母" HDR-TH_14P-P2.54-V-F-R2-C7-S2.54-1 6626,5714 r270 top
J6 "2.54-2*7P母" HDR-TH_14P-P2.54-V-F-R2-C7-S2.54-1 6626,4879.4 r270 top locked
J7 "2.54-2*7P母" HDR-TH_14P-P2.54-V-F-R2-C7-S2.54-1 6626,4044.7 r270 top
J8 "2.54-2*7P母" HDR-TH_14P-P2.54-V-F-R2-C7-S2.54-1 3303.1,6548.6 r270 top
J9 "2.54-2*7P母" HDR-TH_14P-P2.54-V-F-R2-C7-S2.54-1 3303.1,5714 r270 top
J10 "2.54-2*7P母" HDR-TH_14P-P2.54-V-F-R2-C7-S2.54-1 3303.1,4879.4 r270 top
J11 "2.54-2*7P母" HDR-TH_14P-P2.54-V-F-R2-C7-S2.54-1 3303.1,4044.7 r270 top
L1 "2.2uH" L0806#1 4440.3,6216.5 r0 top
L3 "2.2uH" L0806#2 3775.6,5434.5 r0 top
L5 "15uH" IND-SMD_L7.0-W6.6_FXL0630#1 4956.7,3843.9 r180 top
L6 "15uH" IND-SMD_L7.0-W6.6_FXL0630#2 5976.4,3832.1 r180 top
L7 "15uH" IND-SMD_L7.0-W6.6_FXL0630#1 3834.6,3777 r180 top
L8 "15uH" IND-SMD_L7.0-W6.6_FXL0630#2 5484.3,3832.1 r180 top
L12 "2.2uH" L0806#3 5811,5391.2 r270 top
LED1 "FC-DA1608HRK-620D" LED0603-RD_RED#1 6491.4,3484.3 r270 top
LED2 "FC-DA1608HRK-620D" LED0603-RD_RED#1 6727.6,3484.3 r270 top
LED3 "FC-DA1608HRK-620D" LED0603-RD_RED#1 6609.5,3484.3 r270 top
LED4 "FC-DA1608HRK-620D" LED0603-RD_RED#2 4590.5,6765.2 r270 top
P3 "2.54-1*1P针" HDR-TH_1P-P2.54-V-M 3618.1,3403 r0 top
P4 "2.54-1*1P针" HDR-TH_1P-P2.54-V-M 3507.9,3292.7 r0 top
P5 "2.54-1*1P针" HDR-TH_1P-P2.54-V-M 3507.9,3403 r0 top
P6 "2.54-1*1P针" HDR-TH_1P-P2.54-V-M 4169.3,3292.7 r0 top
P7 "2.54-1*1P针" HDR-TH_1P-P2.54-V-M 4279.5,3292.7 r0 top
P8 "2.54-1*1P针" HDR-TH_1P-P2.54-V-M 3948.8,3403 r0 top
P9 "2.54-1*1P针" HDR-TH_1P-P2.54-V-M 3948.8,3292.7 r0 top
P10 "2.54-1*1P针" HDR-TH_1P-P2.54-V-M 3397.6,3403 r0 top
R1 "100kΩ" R0402#1 4282.8,6476.3 r180 top
R2 "120kΩ" R1206 4357.6,6397.6 r180 top
R3 "1.5kΩ" R0603#1 4164.5,6026.9 r270 top
R4 "10kΩ" R0603#2 5787.4,3607.7 r90 top
R5 "360kΩ" R0603#3 3594.5,5627.4 r90 top
R6 "82kΩ" R0603#1 3665.4,5627.4 r270 top
R7 "500kΩ" R0805#1 4275.6,6210.1 r0 top
R8 "5.1kΩ" R0603#3 4855,6561.9 r180 top
R9 "5.1kΩ" R0603#1 5138.5,6518.5 r90 top
R10 "4.7kΩ" R0402#1 4078.7,5777 r0 top
R11 "20Ω" R0603#1 4996.1,6403 r180 top
R12 "4.7kΩ" R0603#3 4996.1,6328.2 r0 top
R13 "500kΩ" R0805#2 5252,4351.7 r270 top
R14 "100kΩ" R0402#2 4858.3,4245.4 r0 top
R15 "100kΩ" R0402#3 5252,4623.4 r270 top
R16 "150kΩ" R0603#2 5913.4,4280.9 r180 top
R20 "100kΩ" R0402#1 6255.9,4599.8 r270 top
R21 "4.7kΩ" R0603#3 4582.7,5316.4 r90 top
R22 "500kΩ" R0805#2 6255.9,4395 r270 top
R23 "20Ω" R0603#1 5031.5,6477.8 r180 top
R25 "100kΩ" R0402#3 4070.9,4544.7 r270 top
R27 "500kΩ" R0805#1 4070.9,4312.4 r270 top
R34 "300Ω" R0402#1 6610.2,3371.5 r270 top
R40 "82kΩ" R0603#3 5976.4,5532.9 r90 top
R42 "500kΩ" R0805#3 3610.2,5430.5 r0 top
R43 "500kΩ" R0805#3 5811,5560.5 r270 top
R46 "100kΩ" R0402#3 5748,4623.4 r270 top
R47 "100kΩ" R0402#1 5393.7,4249.4 r0 top
R48 "500kΩ" R0805#1 5759.8,4446.3 r270 top
R98 "5.1kΩ" R0603#3 5416.6,3397.6 r180 top
R99 "100Ω" R0603#3 4720.5,6182.5 r0 top
R100 "4.7kΩ" R0603#3 5645.7,6166.8 r90 top
R101 "4.7kΩ" R0603#3 5578,6165.3 r90 top
R102 "12kΩ" R0402#2 4618.1,5158.9 r90 top
R103 "500Ω" R0805#1 6740.6,3341.8 r270 top
R104 "13.3kΩ" R0603#1 5666.7,4560.6 r270 top
R105 "13.3kΩ" R0603#1 5095.8,4545.8 r0 top
R106 "4.7kΩ" R0603#3 4232,5816.4 r90 top
R107 "4.7kΩ" R0603#3 4131.4,5086.5 r270 top
R108 "100Ω" R0603#1 6021,4556.6 r0 top
R109 "100Ω" R0603#2 6493.4,3356.6 r270 top
R110 "255kΩ" R0805#3 6074.8,5591.9 r90 top
SW1 "PS-1049SVD-4PN" SW-SMD_4P-L10.0-W10.0-P6.00-LS12.2 6133.9,3399 r0 top
U1 "LFE5U-25F-6BG256C" CABGA-256_L14.0-W14.0-R16-C16-P0.80-TL 4850.4,5851.8 r270 top
U2 "TLV62569DRLR" SOT-563_L1.6-W1.2-P0.50-LS1.6-BL 4290.6,6303.1 r270 top
U4 "TLV62569DRLR" SOT-563_L1.6-W1.2-P0.50-LS1.6-BL 3610.2,5521.1 r270 top
U5 "TLV62569DRLR" SOT-563_L1.6-W1.2-P0.50-LS1.6-BL 5897.6,5564.4 r180 top
U8 "IS61WV25616BLL-10BLI" TFBGA-48_L8.0-W6.0-R8-C6-P0.75-TL 4846.5,5410.8 r90 top
U13 "TPS54202DDCR" SOT-23-6_L2.9-W1.6-P0.95-LS2.8-BL 5141.7,4355 r0 top
U14 "TPS54202DDCR" SOT-23-6_L2.9-W1.6-P0.95-LS2.8-BL 6141.7,4367.5 r0 top
U15 "TPS54202DDCR" SOT-23-6_L2.9-W1.6-P0.95-LS2.8-BL 3956.7,4320.3 r0 top
U16 "10.5kΩ" R0603#1 6149.6,4556.5 r0 top
U17 "10.5kΩ" R0603#1 3996.1,4529 r270 top
U18 "200kΩ" R0603#3 3716.5,4214 r180 top
U20 "FM25V02A-GTR" SOIC-8_L5.0-W4.0-P1.27-LS6.0-BL 4121.2,5589.9 r0 top
U25 "27MHz" CRYSTAL-SMD_4P-L2.5-W2.0-BL 5755.9,5989.6 r180 top
U30 "TPS54202DDCR" SOT-23-6_L2.9-W1.6-P0.95-LS2.8-BL 5629.9,4367.5 r0 top
U35 "SN74CB3T3245PWR" TSSOP-20_L6.5-W4.4-P0.65-LS6.4-BL 6125.9,4839.9 r270 top
U36 "MS5351M" MSOP-10_L3.0-W3.0-P0.50-LS5.0-BL 5480.3,6032.9 r90 top
U37 "FT232HQ-REEL" QFN-48_L8.0-W8.0-P0.50-BL-EP 4354.3,5194.3 r90 top
U39 "W25Q256JVEIQ" WSON-8_L8.0-W6.10-P1.27-BL-EP 4405.5,5879.4 r0 top
USB1 "TYPE-C-31-E-07" USB-C-SMD_TYPE-C-31-E-07 5416.6,3244.1 r0 top
USBC1 "TYPE-C-31-M-12" USB-C_SMD-TYPE-C-31-M-12 4969.2,6778.4 r180 top

## Footprints (in the part's own frame and the unit in brackets; to place one, negate y for a bottom-side part, rotate by r counter-clockwise, add the part's x,y. Pads: shape width x height; smd on the part's side, far side on the other; paste and mask are expansions set on the pad)
C0201 [mil]
  rect 14.5x12.8 smd paste-3937 mask+2: 1(-10.8,0) 2(10.8,0)
  silkscreen extent -27,-15 27,15
C0603#1 [mil]
  rect 31.5x35.4 smd: 1(-27.5,0) 2(27.6,0)
  silkscreen extent -55,-28 55,28
C0603#2 [mil]
  rect 31.5x35.4 smd: 1(-27.6,0) 2(27.5,0)
  silkscreen extent -55,-28 55,28
C0603#3 [mil]
  rect 31.5x35.4 smd: 1(-27.6,0) 2(27.6,0)
  silkscreen extent -55,-28 55,28
C0805#1 [mil]
  rect 55.5x53.1 smd paste-3937 mask+2: 1(-39.4,0) 2(39.3,0)
  silkscreen extent -77,-36 77,36
C0805#2 [mil]
  rect 55.5x53.1 smd paste-3937 mask+2: 1(-39.4,0) 2(39.4,0)
  silkscreen extent -77,-36 77,36
C0805#3 [mil]
  rect 55.5x53.1 smd paste-3937 mask+2: 1(-39.3,0) 2(39.4,0)
  silkscreen extent -77,-36 77,36
C1210#1 [mil]
  rect 64.4x106.3 smd paste-3937 mask+2: 1(-59.8,0) 2(59.7,0)
  silkscreen extent -101,-62 101,62
C1210#2 [mil]
  rect 64.4x106.3 smd paste-3937 mask+2: 1(-59.7,0) 2(59.8,0)
  silkscreen extent -101,-62 101,62
C1210#3 [mil]
  rect 64.4x106.3 smd paste-3937 mask+2: 1(-59.7,0) 2(59.7,0)
  silkscreen extent -101,-62 101,62
CABGA-256_L14.0-W14.0-R16-C16-P0.80-TL [mil]
  round 14.2 smd paste-3937 mask+2: A1(-236.2,236.2) A2(-204.7,236.2) A3(-173.2,236.2) A4(-141.7,236.2) A5(-110.2,236.2) A6(-78.7,236.2) A7(-47.2,236.2) A8(-15.7,236.2) A9(15.8,236.2) A10(47.3,236.2) A11(78.8,236.2) A12(110.3,236.2) A13(141.7,236.2) A14(173.2,236.2) A15(204.7,236.2) A16(236.2,236.2) B1(-236.2,204.7) B2(-204.7,204.7) B3(-173.2,204.7) B4(-141.7,204.7) B5(-110.2,204.7) B6(-78.7,204.7) B7(-47.2,204.7) B8(-15.7,204.7) B9(15.8,204.7) B10(47.3,204.7) B11(78.8,204.7) B12(110.3,204.7) B13(141.7,204.7) B14(173.2,204.7) B15(204.7,204.7) B16(236.2,204.7) C1(-236.2,173.2) C2(-204.7,173.2) C3(-173.2,173.2) C4(-141.7,173.2) C5(-110.2,173.2) C6(-78.7,173.2) C7(-47.2,173.2) C8(-15.7,173.2) C9(15.8,173.2) C10(47.3,173.2) C11(78.8,173.2) C12(110.3,173.2) C13(141.7,173.2) C14(173.2,173.2) C15(204.7,173.2) C16(236.2,173.2) D1(-236.2,141.7) D2(-204.7,141.7) D3(-173.2,141.7) D4(-141.7,141.7) D5(-110.2,141.7) D6(-78.7,141.7) D7(-47.2,141.7) D8(-15.7,141.7) D9(15.8,141.7) D10(47.3,141.7) D11(78.8,141.7) D12(110.3,141.7) D13(141.7,141.7) D14(173.2,141.7) D15(204.7,141.7) D16(236.2,141.7) E1(-236.2,110.2) E2(-204.7,110.2) E3(-173.2,110.2) E4(-141.7,110.2) E5(-110.2,110.2) E6(-78.7,110.2) E7(-47.2,110.2) E8(-15.7,110.2) E9(15.8,110.2) E10(47.3,110.2) E11(78.8,110.2) E12(110.3,110.2) E13(141.7,110.2) E14(173.2,110.2) E15(204.7,110.2) E16(236.2,110.2) F1(-236.2,78.7) F2(-204.7,78.7) F3(-173.2,78.7) F4(-141.7,78.7) F5(-110.2,78.7) F6(-78.7,78.7) F7(-47.2,78.7) F8(-15.7,78.7) F9(15.8,78.7) F10(47.3,78.7) F11(78.8,78.7) F12(110.3,78.7) F13(141.7,78.7) F14(173.2,78.7) F15(204.7,78.7) F16(236.2,78.7) G1(-236.2,47.2) G2(-204.7,47.2) G3(-173.2,47.2) G4(-141.7,47.2) G5(-110.2,47.2) G6(-78.7,47.2) G7(-47.2,47.2) G8(-15.7,47.2) G9(15.8,47.2) G10(47.3,47.2) G11(78.8,47.2) G12(110.3,47.2) G13(141.7,47.2) G14(173.2,47.2) G15(204.7,47.2) G16(236.2,47.2) H1(-236.2,15.8) H2(-204.7,15.8) H3(-173.2,15.8) H4(-141.7,15.8) H5(-110.2,15.8) H6(-78.7,15.8) H7(-47.2,15.8) H8(-15.7,15.8) H9(15.8,15.8) H10(47.3,15.8) H11(78.8,15.8) H12(110.3,15.8) H13(141.7,15.8) H14(173.2,15.8) H15(204.7,15.8) H16(236.2,15.8) J1(-236.2,-15.7) J2(-204.7,-15.7) J3(-173.2,-15.7) J4(-141.7,-15.7) J5(-110.2,-15.7) J6(-78.7,-15.7) J7(-47.2,-15.7) J8(-15.7,-15.7) J9(15.8,-15.7) J10(47.3,-15.7) J11(78.8,-15.7) J12(110.3,-15.7) J13(141.7,-15.7) J14(173.2,-15.7) J15(204.7,-15.7) J16(236.2,-15.7) K1(-236.2,-47.2) K2(-204.7,-47.2) K3(-173.2,-47.2) K4(-141.7,-47.2) K5(-110.2,-47.2) K6(-78.7,-47.2) K7(-47.2,-47.2) K8(-15.7,-47.2) K9(15.8,-47.2) K10(47.3,-47.2) K11(78.8,-47.2) K12(110.3,-47.2) K13(141.7,-47.2) K14(173.2,-47.2) K15(204.7,-47.2) K16(236.2,-47.2) L1(-236.2,-78.7) L2(-204.7,-78.7) L3(-173.2,-78.7) L4(-141.7,-78.7) L5(-110.2,-78.7) L6(-78.7,-78.7) L7(-47.2,-78.7) L8(-15.7,-78.7) L9(15.8,-78.7) L10(47.3,-78.7) L11(78.8,-78.7) L12(110.3,-78.7) L13(141.7,-78.7) L14(173.2,-78.7) L15(204.7,-78.7) L16(236.2,-78.7) M1(-236.2,-110.2) M2(-204.7,-110.2) M3(-173.2,-110.2) M4(-141.7,-110.2) M5(-110.2,-110.2) M6(-78.7,-110.2) M7(-47.2,-110.2) M8(-15.7,-110.2) M9(15.8,-110.2) M10(47.3,-110.2) M11(78.8,-110.2) M12(110.3,-110.2) M13(141.7,-110.2) M14(173.2,-110.2) M15(204.7,-110.2) M16(236.2,-110.2) N1(-236.2,-141.7) N2(-204.7,-141.7) N3(-173.2,-141.7) N4(-141.7,-141.7) N5(-110.2,-141.7) N6(-78.7,-141.7) N7(-47.2,-141.7) N8(-15.7,-141.7) N9(15.8,-141.7) N10(47.3,-141.7) N11(78.8,-141.7) N12(110.3,-141.7) N13(141.7,-141.7) N14(173.2,-141.7) N15(204.7,-141.7) N16(236.2,-141.7) P1(-236.2,-173.2) P2(-204.7,-173.2) P3(-173.2,-173.2) P4(-141.7,-173.2) P5(-110.2,-173.2) P6(-78.7,-173.2) P7(-47.2,-173.2) P8(-15.7,-173.2) P9(15.8,-173.2) P10(47.3,-173.2) P11(78.8,-173.2) P12(110.3,-173.2) P13(141.7,-173.2) P14(173.2,-173.2) P15(204.7,-173.2) P16(236.2,-173.2) R1(-236.2,-204.7) R2(-204.7,-204.7) R3(-173.2,-204.7) R4(-141.7,-204.7) R5(-110.2,-204.7) R6(-78.7,-204.7) R7(-47.2,-204.7) R8(-15.7,-204.7) R9(15.8,-204.7) R10(47.3,-204.7) R11(78.8,-204.7) R12(110.3,-204.7) R13(141.7,-204.7) R14(173.2,-204.7) R15(204.7,-204.7) R16(236.2,-204.7) T1(-236.2,-236.2) T2(-204.7,-236.2) T3(-173.2,-236.2) T4(-141.7,-236.2) T5(-110.2,-236.2) T6(-78.7,-236.2) T7(-47.2,-236.2) T8(-15.7,-236.2) T9(15.8,-236.2) T10(47.3,-236.2) T11(78.8,-236.2) T12(110.3,-236.2) T13(141.7,-236.2) T14(173.2,-236.2) T15(204.7,-236.2) T16(236.2,-236.2)
  silkscreen extent -300,-279 279,288
CAP-SMD_L3.2-W1.6-RD#1 [mil]
  rect 59.1x51 smd paste+0 mask+2: 1(-66.4,0) 2(66.3,0)
  silkscreen extent -81,-38 66,37
CAP-SMD_L3.2-W1.6-RD#2 [mil]
  rect 59.1x51 smd paste+0 mask+2: 1(-66.4,0) 2(66.4,0)
  silkscreen extent -81,-38 66,37
CAP-SMD_L3.2-W1.6-RD#3 [mil]
  rect 59.1x51 smd paste+0 mask+2: 1(-66.3,0) 2(66.4,0)
  silkscreen extent -81,-38 66,37
CASE-A_3216 [mil]
  rect 59.1x53.5 smd: 1(-47.3,0) 2(47.2,0)
  silkscreen extent -63,-32 63,32
CRYSTAL-SMD_4P-L2.5-W2.0-BL [mil]
  rect 47.2x43.3 smd: 1(-37.4,-29.5) 2(37.4,-29.5) 3(37.4,29.5) 4(-37.4,29.5)
  silkscreen extent -79,-69 70,60
HDR-TH_1P-P2.54-V-M [mil]
  rect 66.9x66.9 hole 43.3: 1(0,0)
  silkscreen extent -50,-50 50,50
HDR-TH_2P-P2.54-V-M-1 [mil]
  rect 70.9x70.9 hole 43.3: 1(-50,0)
  round 70.9 hole 43.3: 2(50,0)
  silkscreen extent -100,-50 100,50
HDR-TH_14P-P2.54-V-F-R2-C7-S2.54-1 [mil]
  rect 70.9x70.9 hole 43.3: 1(-300,-50)
  round 70.9 hole 43.3: 2(-300,50) 3(-200,-50) 4(-200,50) 5(-100,-50) 6(-100,50) 7(0,-50) 8(0,50) 9(100,-50) 10(100,50) 11(200,-50) 12(200,50) 13(300,-50) 14(300,50)
  silkscreen extent -358,-102 358,102
IND-SMD_L7.0-W6.6_FXL0630#1 [mil]
  rect 95.4x142.5 smd: 1(123.1,0) 2(-123.2,0)
  silkscreen extent -141,-133 141,133
IND-SMD_L7.0-W6.6_FXL0630#2 [mil]
  rect 95.4x142.5 smd: 1(123.2,0) 2(-123.1,0)
  silkscreen extent -141,-133 141,133
L0806#1 [mil]
  rect 47.2x70.9 smd: 1(-39.4,0) 2(39.3,0)
  silkscreen extent -75,-47 75,47
L0806#2 [mil]
  rect 47.2x70.9 smd: 1(-39.4,0) 2(39.4,0)
  silkscreen extent -75,-47 75,47
L0806#3 [mil]
  rect 47.2x70.9 smd: 1(-39.3,0) 2(39.4,0)
  silkscreen extent -75,-47 75,47
LED0603-RD_RED#1 [mil]
  rect 31.5x31.5 smd: 1(-31.4,-0.1) 2(31.5,0.2)
  silkscreen extent -59,-29 55,30
LED0603-RD_RED#2 [mil]
  rect 31.5x31.5 smd: 1(-31.5,-0.1) 2(31.5,0.2)
  silkscreen extent -59,-29 55,30
MSOP-10_L3.0-W3.0-P0.50-LS5.0-BL [mil]
  oval 11x63.8 smd: 1(-39.4,-83.1) 2(-19.7,-83.1) 3(0,-83.1) 4(19.7,-83.1) 5(39.4,-83.1) 6(39.4,83.1) 7(19.7,83.1) 8(0,83.1) 9(-19.7,83.1) 10(-39.4,83.1)
  silkscreen extent -69,-89 62,42
QFN-48_L8.0-W8.0-P0.50-BL-EP [mil]
  rect 11x35.6 smd: 1(-108.3,-152.7) 2(-88.6,-152.7) 3(-68.9,-152.7) 4(-49.2,-152.7) 5(-29.5,-152.7) 6(-9.8,-152.7) 7(9.9,-152.7) 8(29.5,-152.7) 9(49.2,-152.7) 10(68.9,-152.7) 11(88.6,-152.7) 12(108.3,-152.7) 25(108.3,152.6) 26(88.6,152.6) 27(68.9,152.6) 28(49.2,152.6) 29(29.5,152.6) 30(9.9,152.6) 31(-9.8,152.6) 32(-29.5,152.6) 33(-49.2,152.6) 34(-68.9,152.6) 35(-88.6,152.6) 36(-108.3,152.6)
  rect 35.6x11 smd: 13(152.7,-108.3) 14(152.7,-88.6) 15(152.7,-68.9) 16(152.7,-49.2) 17(152.7,-29.6) 18(152.7,-9.9) 19(152.7,9.8) 20(152.7,29.5) 21(152.7,49.2) 22(152.7,68.9) 23(152.7,88.6) 24(152.7,108.2) 37(-152.6,108.2) 38(-152.6,88.6) 39(-152.6,68.9) 40(-152.6,49.2) 41(-152.6,29.5) 42(-152.6,9.8) 43(-152.6,-9.9) 44(-152.6,-29.6) 45(-152.6,-49.2) 46(-152.6,-68.9) 47(-152.6,-88.6) 48(-152.6,-108.3)
  rect 244.1x244.1 smd: 49(0,0)
  silkscreen extent -160,-185 160,160
R0402#1 [mil]
  rect 22.3x21.3 smd paste-3937 mask+2: 1(-17,0) 2(17.1,0)
  silkscreen extent -37,-20 37,20
R0402#2 [mil]
  rect 22.3x21.3 smd paste-3937 mask+2: 1(-17.1,0) 2(17,0)
  silkscreen extent -37,-20 37,20
R0402#3 [mil]
  rect 22.3x21.3 smd paste-3937 mask+2: 1(-17,0) 2(17,0)
  silkscreen extent -37,-20 37,20
R0603#1 [mil]
  rect 31.8x34 smd paste-3937 mask+2: 1(-29.6,0) 2(29.7,0)
  silkscreen extent -55,-26 55,26
R0603#2 [mil]
  rect 31.8x34 smd paste-3937 mask+2: 1(-29.7,0) 2(29.7,0)
  silkscreen extent -54,-26 54,26
R0603#3 [mil]
  rect 31.8x34 smd paste-3937 mask+2: 1(-29.7,0) 2(29.6,0)
  silkscreen extent -54,-26 54,26
R0805#1 [mil]
  rect 44.6x54.2 smd paste-3937 mask+2: 1(-39.4,0) 2(39.4,0)
  silkscreen extent -69,-36 69,36
R0805#2 [mil]
  rect 44.6x54.2 smd paste-3937 mask+2: 1(-39.4,0) 2(39.3,0)
  silkscreen extent -69,-36 69,36
R0805#3 [mil]
  rect 44.6x54.2 smd paste-3937 mask+2: 1(-39.3,0) 2(39.4,0)
  silkscreen extent -69,-36 69,36
R1206 [mil]
  rect 47.5x67 smd paste-3937 mask+2: 1(-58.2,0) 2(58.2,0)
  silkscreen extent -91,-43 91,43
SMA_L4.3-W2.6-LS5.0-RD [mil]
  rect 80.6x63.8 smd: 1(-94.6,-0.4) 2(94.7,0.3)
  silkscreen extent -103,-57 85,57
SMA_L4.3-W2.6-LS5.2-RD [mil]
  rect 78.7x78.7 smd: 1(-86.6,-0.1) 2(86.6,-0.1)
  silkscreen extent -117,-59 102,59
SMA_L4.4-W2.8-LS5.4-R-RD [mil]
  rect 81.2x60.6 smd: 1(98.6,0) 2(-98.6,0)
  silkscreen extent -119,-56 104,56
SOIC-8_L5.0-W4.0-P1.27-LS6.0-BL [mil]
  oval 22.4x76.8 smd: 1(-75,-106.5) 2(-25,-106.5) 3(25,-106.5) 4(75,-106.5) 5(75,106.5) 6(25,106.5) 7(-25,106.5) 8(-75,106.5)
  silkscreen extent -98,-59 98,59
SOT-23-6_L2.9-W1.6-P0.95-LS2.8-BL [mil]
  rect 20.9x42.2 smd: 1(-37.4,-45.2) 2(0,-45.2) 3(37.4,-45.2) 4(37.4,45.2) 5(0,45.2) 6(-37.4,45.2)
  silkscreen extent -72,-57 61,35
SOT-563_L1.6-W1.2-P0.50-LS1.6-BL [mil]
  rect 11x21.5 smd: 1(-19.7,-28.4) 2(0,-28.4) 3(19.7,-28.4) 4(19.7,28.5) 5(0,28.5) 6(-19.7,28.5)
  silkscreen extent -39,-44 35,27
SW-SMD_4P-L10.0-W10.0-P6.00-LS12.2 [mil]
  rect 70.9x55.1 smd: 1(-212.6,118.2) 2(212.5,118.2) 3(-212.6,-118.1) 4(212.5,-118.1)
  silkscreen extent -197,-198 197,196
TFBGA-48_L8.0-W6.0-R8-C6-P0.75-TL [mil]
  round 11 smd paste-3937 mask+2: A1(-73.8,103.4) A2(-44.2,103.4) A3(-14.7,103.4) A4(14.8,103.4) A5(44.3,103.4) A6(73.9,103.4) B1(-73.8,73.9) B2(-44.2,73.9) B3(-14.7,73.9) B4(14.8,73.9) B5(44.3,73.9) B6(73.9,73.9) C1(-73.8,44.3) C2(-44.2,44.3) C3(-14.7,44.3) C4(14.8,44.3) C5(44.3,44.3) C6(73.9,44.3) D1(-73.8,14.8) D2(-44.2,14.8) D3(-14.7,14.8) D4(14.8,14.8) D5(44.3,14.8) D6(73.9,14.8) E1(-73.8,-14.7) E2(-44.2,-14.7) E3(-14.7,-14.7) E4(14.8,-14.7) E5(44.3,-14.7) E6(73.9,-14.7) F1(-73.8,-44.2) F2(-44.2,-44.2) F3(-14.7,-44.2) F4(14.8,-44.2) F5(44.3,-44.2) F6(73.9,-44.2) G1(-73.8,-73.8) G2(-44.2,-73.8) G3(-14.7,-73.8) G4(14.8,-73.8) G5(44.3,-73.8) G6(73.9,-73.8) H1(-73.8,-103.3) H2(-44.2,-103.3) H3(-14.7,-103.3) H4(14.8,-103.3) H5(44.3,-103.3) H6(73.9,-103.3)
  silkscreen extent -143,-160 121,170
TSSOP-20_L6.5-W4.4-P0.65-LS6.4-BL [mil]
  oval 14.3x68.6 smd: 1(-115.2,-113) 2(-89.6,-113) 3(-64,-113) 4(-38.4,-113) 5(-12.8,-113) 6(12.8,-113) 7(38.4,-113) 8(63.9,-113) 9(89.5,-113) 10(115.1,-113) 11(115.1,113.1) 12(89.5,113.1) 13(63.9,113.1) 14(38.4,113.1) 15(12.8,113.1) 16(-12.8,113.1) 17(-38.4,113.1) 18(-64,113.1) 19(-89.6,113.1) 20(-115.2,113.1)
  silkscreen extent -146,-119 131,70
USB-C-SMD_TYPE-C-31-E-07 [mil]
  oval 43.3x78.7 hole 27.6 slot 63 at 90 deg paste+0 mask+2: 7(-181.1,-45.3) 10(181.1,-45.3)
  round 55.1 hole 39.4 paste+0 mask+2: 8(-78.7,-45.3) 9(78.8,-45.3)
  rect 31.5x63 smd paste-3937 mask+2: A5(-23.6,45.3) A9(70.9,45.3) A12(118.1,45.3) B5(23.6,45.3) B9(-70.8,45.3) B12(-118.1,45.3)
  silkscreen extent -198,-240 198,22
USB-C_SMD-TYPE-C-31-M-12 [mil]
  oval 47.2x78.7 hole 31.5 slot 63 at 90 deg: 0(-170.3,67.2) 1(170.3,67.2)
  oval 47.2x70.9 hole 31.5 slot 55.1 at 90 deg: 2(170.3,-97.4) 3(-170.3,-97.4)
  rect 11.8x51.2 smd paste-3937 mask+2: A1(-131.9,97.4) A4(-100.4,97.4) A5(-49.2,97.4) A6(-9.9,97.4) A7(9.8,97.4) A8(49.2,97.4) A9(100.4,97.4) A12(131.9,97.4) B1(120.1,97.4) B4(88.6,97.4) B5(68.9,97.4) B6(29.5,97.4) B7(-29.5,97.4) B8(-68.9,97.4) B9(-88.6,97.4) B12(-120.1,97.4)
  Board Outline Layer lines w0.1: 128.9,47.5 128.5,44.1 127.4,40.9 125.5,38 123,35.6 120,33.9 116.7,32.9 113.3,32.7 109.9,33.3 106.8,34.7 104,36.7 101.8,39.4 100.3,42.4 99.5,45.8 99.5,49.2 100.3,52.5 101.8,55.6 104,58.2 106.8,60.3 109.9,61.6 113.3,62.2 116.7,62 120,61 123,59.3 125.5,57 127.4,54.1 128.5,50.9 128.9,47.5 ; -99.4,47.5 -99.8,44.1 -101,40.9 -102.9,38 -105.4,35.6 -108.3,33.9 -111.6,32.9 -115,32.7 -118.4,33.3 -121.6,34.7 -124.3,36.7 -126.5,39.4 -128.1,42.4 -128.8,45.8 -128.8,49.2 -128.1,52.5 -126.5,55.6 -124.3,58.2 -121.6,60.3 -118.4,61.6 -115,62.2 -111.6,62 -108.3,61 -105.4,59.3 -102.9,57 -101,54.1 -99.8,50.9 -99.4,47.5
  Board Outline Layer region: -99.4,47.5 -99.8,44.1 -101,40.9 -102.9,38 -105.4,35.6 -108.3,33.9 -111.6,32.9 -115,32.7 -118.4,33.3 -121.6,34.7 -124.3,36.7 -126.5,39.4 -128.1,42.4 -128.8,45.8 -128.8,49.2 -128.1,52.5 -126.5,55.6 -124.3,58.2 -121.6,60.3 -118.4,61.6 -115,62.2 -111.6,62 -108.3,61 -105.4,59.3 -102.9,57 -101,54.1 -99.8,50.9
  Board Outline Layer region: -99.4,47.5 -99.8,44.1 -101,40.9 -102.9,38 -105.4,35.6 -108.3,33.9 -111.6,32.9 -115,32.7 -118.4,33.3 -121.6,34.7 -124.3,36.7 -126.5,39.4 -128.1,42.4 -128.8,45.8 -128.8,49.2 -128.1,52.5 -126.5,55.6 -124.3,58.2 -121.6,60.3 -118.4,61.6 -115,62.2 -111.6,62 -108.3,61 -105.4,59.3 -102.9,57 -101,54.1 -99.8,50.9
  Board Outline Layer region: 128.9,47.5 128.5,44.1 127.4,40.9 125.5,38 123,35.6 120,33.9 116.7,32.9 113.3,32.7 109.9,33.3 106.8,34.7 104,36.7 101.8,39.4 100.3,42.4 99.5,45.8 99.5,49.2 100.3,52.5 101.8,55.6 104,58.2 106.8,60.3 109.9,61.6 113.3,62.2 116.7,62 120,61 123,59.3 125.5,57 127.4,54.1 128.5,50.9
  Board Outline Layer region: 128.9,47.5 128.5,44.1 127.4,40.9 125.5,38 123,35.6 120,33.9 116.7,32.9 113.3,32.7 109.9,33.3 106.8,34.7 104,36.7 101.8,39.4 100.3,42.4 99.5,45.8 99.5,49.2 100.3,52.5 101.8,55.6 104,58.2 106.8,60.3 109.9,61.6 113.3,62.2 116.7,62 120,61 123,59.3 125.5,57 127.4,54.1 128.5,50.9
  Multi-Layer board cut-out: -99.4,47.5 -99.8,44.1 -101,40.9 -102.9,38 -105.4,35.6 -108.3,33.9 -111.6,32.9 -115,32.7 -118.4,33.3 -121.6,34.7 -124.3,36.7 -126.5,39.4 -128.1,42.4 -128.8,45.8 -128.8,49.2 -128.1,52.5 -126.5,55.6 -124.3,58.2 -121.6,60.3 -118.4,61.6 -115,62.2 -111.6,62 -108.3,61 -105.4,59.3 -102.9,57 -101,54.1 -99.8,50.9
  Multi-Layer board cut-out: 128.9,47.5 128.5,44.1 127.4,40.9 125.5,38 123,35.6 120,33.9 116.7,32.9 113.3,32.7 109.9,33.3 106.8,34.7 104,36.7 101.8,39.4 100.3,42.4 99.5,45.8 99.5,49.2 100.3,52.5 101.8,55.6 104,58.2 106.8,60.3 109.9,61.6 113.3,62.2 116.7,62 120,61 123,59.3 125.5,57 127.4,54.1 128.5,50.9
  silkscreen extent -176,-201 176,19
WSON-8_L8.0-W6.10-P1.27-BL-EP [mil]
  oval 22x55.1 smd: 1(-75,-158.6) 2(-25,-158.6) 3(25,-158.6) 4(75,-158.6) 5(75,158.5) 6(25,158.5) 7(-25,158.5) 8(-75,158.5)
  rect 169.3x133.9 smd: 9(0,0)
  silkscreen extent -121,-196 121,160

## Via types
v1: diameter 13.8, hole 7.9, Top Layer to Bottom Layer, 291 vias
v2: diameter 25.6, hole 12.2, Top Layer to Bottom Layer, 176 vias
v3: diameter 24, hole 12, Top Layer to Bottom Layer, 13 vias